# EAGLE board entireboard_v1 (EAGLE 8.6.0)
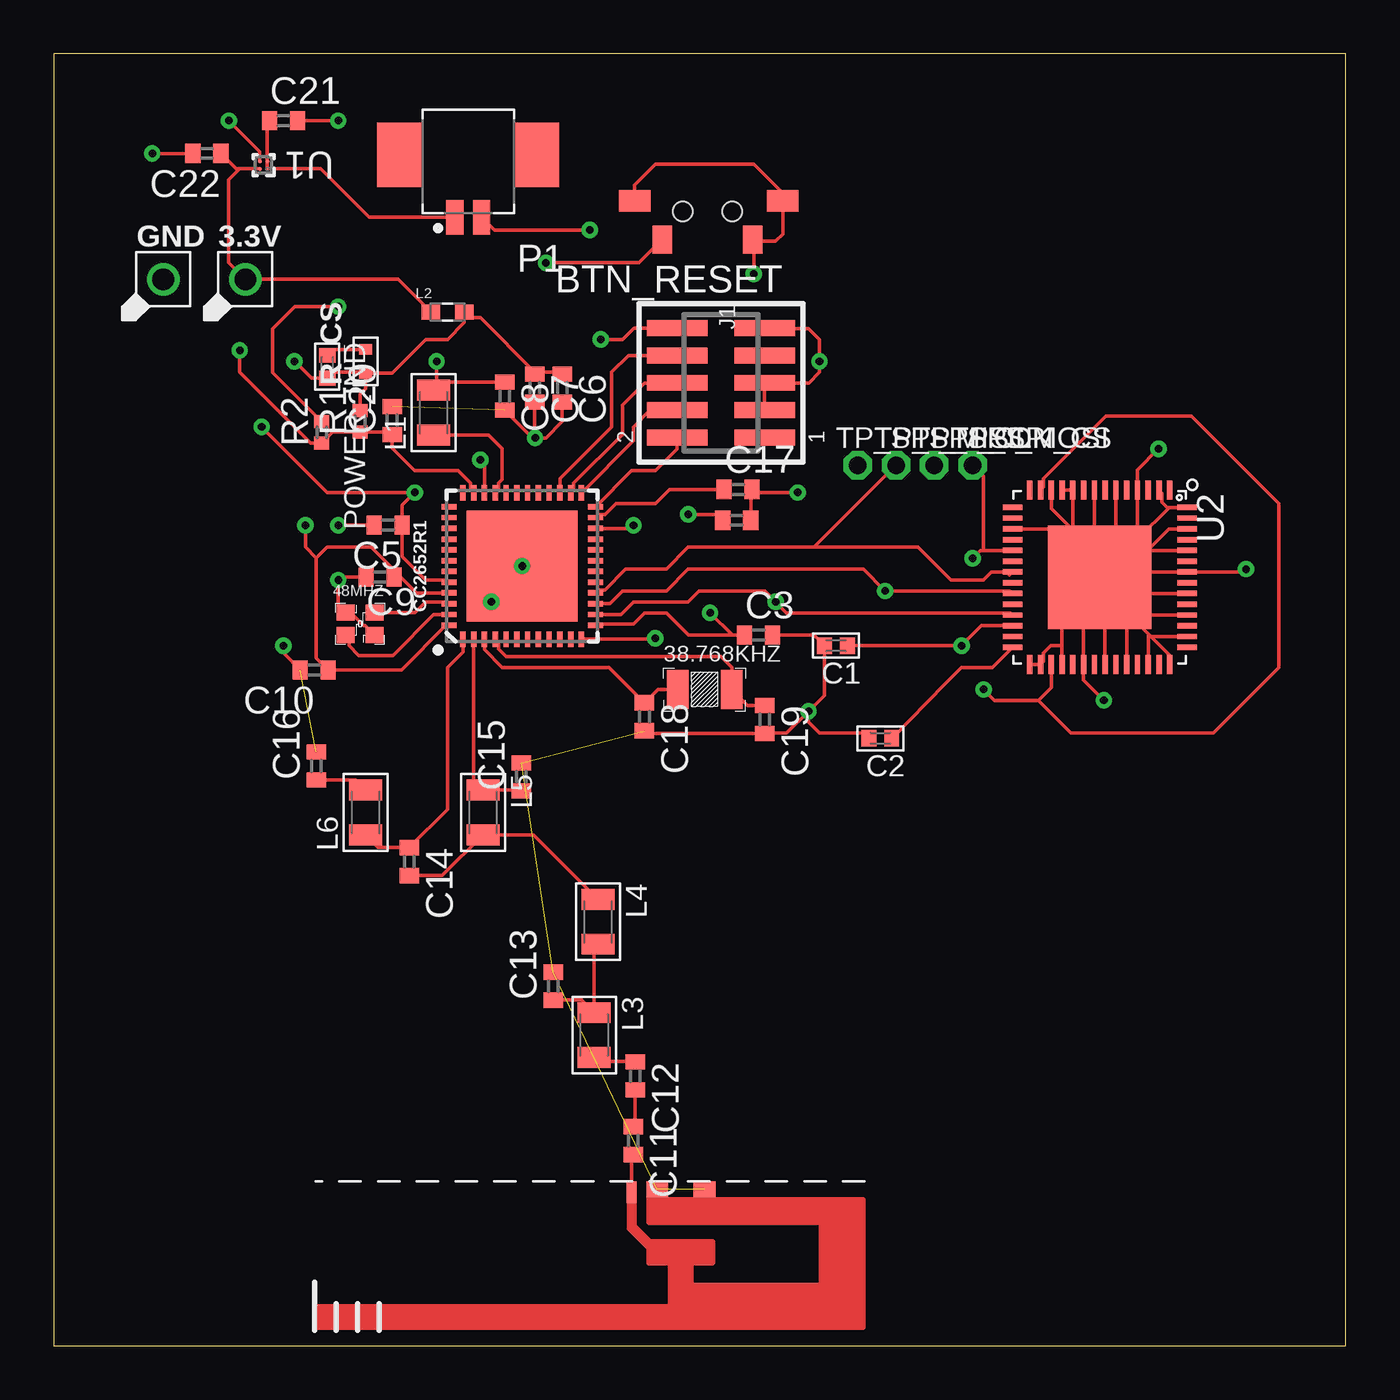
[diagram p0: board, top side]
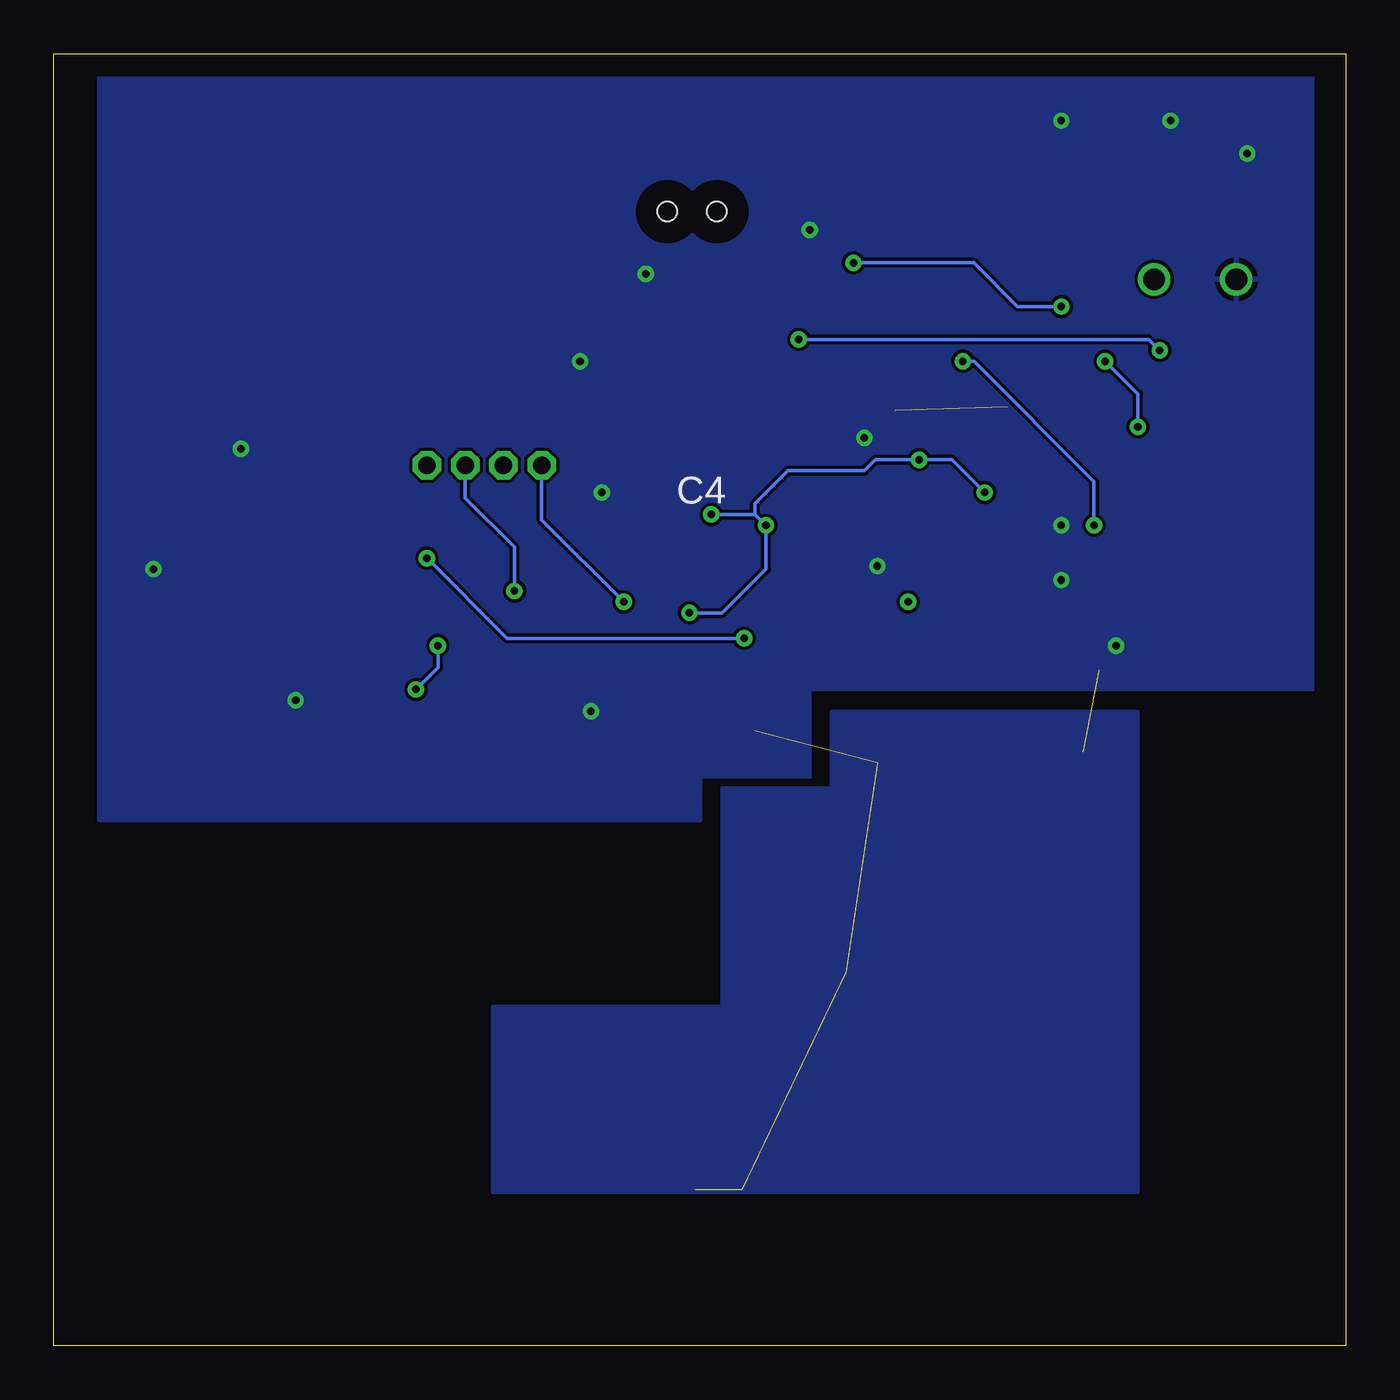
[diagram p1: board, bottom side, seen from below]

Size 60 x 60 mm. Coordinates in mm from the lower left corner, seen from the top.
Outline: 0,0 60,0 60,60 0,60 0,0
Copper layers (1*16): Top 0.035mm / dielectric 1.5mm / Bottom 0.035mm
Design rules "default": minimum track width 6mil, minimum drill 0.35mm, track to track 6mil, track to pad 6mil, pad to pad 6mil, via to via 6mil, smd to smd 6mil, copper to edge 40mil, drill to drill 6mil, minimum pad ring 10mil, minimum via ring 8mil, stop-mask expansion 4mil, vias tented up to drill 0mil, thermal gap 10mil
Net classes: 1 thick: width 1.016 mm; 2 power: width 0.61 mm

## Footprints (pad centres in the part's own frame; a part is rotated, then mirrored left to right if it is on the bottom)
PTH_2.54MM_01X01 = drill 1: P$1 0,0
2-SMD = smd 1 x 1.8: P$1 -1.25,0; P$2 1.25,0
4-SMD = smd 0.85 x 0.75: P$1 -0.675,-0.525; P$2 0.675,-0.525; P$3 0.675,0.525; P$4 -0.675,0.525
SW_1188E = smd 1.45 x 1: P$1 -3.5,-0.5; P$2 3.375,-0.5 | smd 0.9 x 1.3: P$3 -2.1,1.3; P$4 2.1,1.3 | hole 0.9: 1.15,0; -1.15,0
0402 = smd 0.686 x 0.762: 1 -0.533,0; 2 0.533,0
C0402 = smd 0.7 x 0.9: 1 -0.65,0; 2 0.65,0
CC2652R1_QFN-48 = smd 0.7 x 0.25: 1 -3.4,2.75; 2 -3.4,2.25; 3 -3.4,1.75; 4 -3.4,1.25; 5 -3.4,0.75; 6 -3.4,0.25; 7 -3.4,-0.25; 8 -3.4,-0.75; 9 -3.4,-1.25; 10 -3.4,-1.75; 11 -3.4,-2.25; 12 -3.4,-2.75; 25 3.4,-2.75; 26 3.4,-2.25; 27 3.4,-1.75; 28 3.4,-1.25; 29 3.4,-0.75; 30 3.4,-0.25; 31 3.4,0.25; 32 3.4,0.75; 33 3.4,1.25; 34 3.4,1.75; 35 3.4,2.25; 36 3.4,2.75 | smd 0.25 x 0.7: 13 -2.75,-3.4; 14 -2.25,-3.4; 15 -1.75,-3.4; 16 -1.25,-3.4; 17 -0.75,-3.4; 18 -0.25,-3.4; 19 0.25,-3.4; 20 0.75,-3.4; 21 1.25,-3.4; 22 1.75,-3.4; 23 2.25,-3.4; 24 2.75,-3.4; 37 2.75,3.4; 38 2.25,3.4; 39 1.75,3.4; 40 1.25,3.4; 41 0.75,3.4; 42 0.25,3.4; 43 -0.25,3.4; 44 -0.75,3.4; 45 -1.25,3.4; 46 -1.75,3.4; 47 -2.25,3.4; 48 -2.75,3.4 | smd 5.15 x 5.15: EGP 0,0
FTSH-105-01-XXX-DV-K = smd 0.737 x 2.794: 1 -2.54,-2.032; 2 -2.54,2.032; 3 -1.27,-2.032; 4 -1.27,2.032; 5 0,-2.032; 6 0,2.032; 7 1.27,-2.032; 8 1.27,2.032; 9 2.54,-2.032; 10 2.54,2.032
RHD2000_EVAL_BOARD_0805 = smd 0.965 x 1.524: 1 -1.041,0; 2 1.041,0
INDC1608X95 = smd 0.85 x 0.7: 1 -0.775,0; 2 0.775,0
MOLEX_0532610271 = smd 0.8 x 1.6: 1 0.625,0; 2 -0.625,0 | smd 2.1 x 3: 3 -3.175,-2.9; 4 3.175,-2.9
RHD2000_EVAL_BOARD_0402 = smd 0.686 x 0.762: 1 -0.533,0; 2 0.533,0
R0402 = smd 0.6 x 0.7: 1 -0.5,0; 2 0.5,0
R0402' = smd 0.5 x 0.6: P$1 -0.55,0; P$2 0.55,0
RHD2000_EVAL_BOARD_TESTPOINT_SMALL = drill 0.813 octagon: 1 0,0
YKA0004ACAC = smd 0.18 x 0.18: A1 -0.175,0.175; A2 0.175,0.175; B1 -0.175,-0.175; B2 0.175,-0.175
QFN56_8_X_8_LARGE = smd 0.9 x 0.25: 1 -4.05,3.25; 2 -4.05,2.75; 3 -4.05,2.25; 4 -4.05,1.75; 5 -4.05,1.25; 6 -4.05,0.75; 7 -4.05,0.25; 8 -4.05,-0.25; 9 -4.05,-0.75; 10 -4.05,-1.25; 11 -4.05,-1.75; 12 -4.05,-2.25; 13 -4.05,-2.75; 14 -4.05,-3.25; 29 4.05,-3.25; 30 4.05,-2.75; 31 4.05,-2.25; 32 4.05,-1.75; 33 4.05,-1.25; 34 4.05,-0.75; 35 4.05,-0.25; 36 4.05,0.25; 37 4.05,0.75; 38 4.05,1.25; 39 4.05,1.75; 40 4.05,2.25; 41 4.05,2.75; 42 4.05,3.25 | smd 0.25 x 0.9: 15 -3.25,-4.05; 16 -2.75,-4.05; 17 -2.25,-4.05; 18 -1.75,-4.05; 19 -1.25,-4.05; 20 -0.75,-4.05; 21 -0.25,-4.05; 22 0.25,-4.05; 23 0.75,-4.05; 24 1.25,-4.05; 25 1.75,-4.05; 26 2.25,-4.05; 27 2.75,-4.05; 28 3.25,-4.05; 43 3.25,4.05; 44 2.75,4.05; 45 2.25,4.05; 46 1.75,4.05; 47 1.25,4.05; 48 0.75,4.05; 49 0.25,4.05; 50 -0.25,4.05; 51 -0.75,4.05; 52 -1.25,4.05; 53 -1.75,4.05; 54 -2.25,4.05; 55 -2.75,4.05; 56 -3.25,4.05 | smd 4.8 x 4.8: CENTER 0,0
DN007+0 = smd 0.46 x 1: FEED 2.22,-2.8 | smd 1.01 x 0.74: GND -1.16,-2.93; GND@1 1.035,-2.93

## Placement (x,y rotation side)
3.3V  MF-CON-2.54mm-01x01  [PTH_2.54MM_01X01]  8.89,49.53 0 top
38.768KHZ  EPSON_32.768KHZ_CRYSTAL  [2-SMD]  30.23,30.48 0 top
48MHZ  NDK_48MHZ_CRYSTAL  [4-SMD]  14.22,33.53 0 top
BTN_RESET  SW_1188E  [SW_1188E]  30.36,52.67 180 top
C1  100n  [0402]  36.32,32.51 180 top
C2  10n  [0402]  38.39,28.21 180 top
C3  0.1uF  [C0402]  32.73,33.01 0 top
C4  0.1uF  [C0402]  31.72,38.34 0 top
C5  0.1uF  [C0402]  15.53,38.11 180 top
C6  22uF  [C0402]  23.61,44.48 270 top
C7  0.1uF  [C0402]  22.34,44.48 270 top
C8  22uF  [C0402]  20.94,44.1 270 top
C9  0.1uF  [C0402]  15.14,35.7 180 top
C10  0.1uF  [C0402]  12.1,31.38 180 top
C11  1.8pF  [C0402]  26.91,9.53 270 top
C12  12pF  [C0402]  27,12.53 270 top
C13  1pF  [C0402]  23.19,16.7 90 top
C14  1pF  [C0402]  16.51,22.48 270 top
C15  1pF  [C0402]  21.72,26.42 90 top
C16  12pF  [C0402]  12.19,26.92 90 top
C17  1uF  [C0402]  31.78,39.77 0 top
C18  12pF  [C0402]  27.43,29.21 270 top
C19  12pF  [C0402]  33.02,29.08 270 top
C20  0.1uF  [C0402]  15.71,42.97 90 top
C21  1uF  [C0402]  10.67,56.9 0 top
C22  1uF  [C0402]  7.11,55.37 180 top
CC2652R1  CC2652R1  [CC2652R1_QFN-48]  21.75,36.21 90 top
GND  MF-CON-2.54mm-01x01  [PTH_2.54MM_01X01]  5.08,49.53 0 top
J1  FTSH-105-01-XXX-DV-K  [FTSH-105-01-XXX-DV-K]  30.98,44.72 90 top
L1  6.8uH  [RHD2000_EVAL_BOARD_0805]  17.64,43.34 90 top
L2  BLM18HE152SN1D  [INDC1608X95]  18.29,48.01 0 top
L3  2nH  [RHD2000_EVAL_BOARD_0805]  25.1,14.43 270 top
L4  2nH  [RHD2000_EVAL_BOARD_0805]  25.27,19.68 270 top
L5  2.4nH  [RHD2000_EVAL_BOARD_0805]  19.94,24.77 270 top
L6  2.4nH  [RHD2000_EVAL_BOARD_0805]  14.48,24.77 90 top
P1  0532610271  [MOLEX_0532610271]  19.25,52.4 180 top
POWER_IND  LED-SMD  [RHD2000_EVAL_BOARD_0402]  12.7,45.47 270 top
R1  100k  [R0402]  14.22,42.93 90 top
R2  [R0402]  12.45,42.42 90 top
R_CS  0.01ohm  [R0402']  14.48,45.72 90 top
TP_SPI_CLK  RHD2000_EVAL_BOARD_TESTPOINT_SMALL  [RHD2000_EVAL_BOARD_TESTPOINT_SMALL]  39.12,40.89 0 top
TP_SPI_CS  RHD2000_EVAL_BOARD_TESTPOINT_SMALL  [RHD2000_EVAL_BOARD_TESTPOINT_SMALL]  42.67,40.89 0 top
TP_SPI_MISO  RHD2000_EVAL_BOARD_TESTPOINT_SMALL  [RHD2000_EVAL_BOARD_TESTPOINT_SMALL]  37.34,40.89 0 top
TP_SPI_MOSI  RHD2000_EVAL_BOARD_TESTPOINT_SMALL  [RHD2000_EVAL_BOARD_TESTPOINT_SMALL]  40.89,40.89 0 top
U1  YKA  [YKA0004ACAC]  9.74,54.83 180 top
U2  RHD2216_QFN  [QFN56_8_X_8_LARGE]  48.58,35.69 270 top
U$2  INVERTED_F_ANTENNA+0  [DN007+0]  29.06,4.33 180 top

## Library data of the parts
3.3V GND = AxonMobile; HOUSEPART: YES; MPN: MF-CON-2.54mm-01x01; POPULATE: 1; URL: https://factory.macrofab.com/part/MF-CON-2.54mm-01x01
38.768KHZ 48MHZ BTN_RESET CC2652R1 J1 L1 L3-L6 POWER_IND TP_SPI_CLK TP_SPI_CS TP_SPI_MISO TP_SPI_MOSI = AxonMobile
C1 C2 = RHD2000_eval_board
C3-C22 = adafruit
L2 = BLM18HE152SN1D; DIGI-KEY_PART_NUMBER: 490-5216-1-ND; DIGI-KEY_PURCHASE_URL: https://www.digikey.com/product-detail/en/murata-electronics-north-america/BLM18HE152SN1D/490-5216-1-ND/1948392?utm_source=snapeda&utm_medium=aggregator&utm_campaign=symbol; MF: Murata Electronics; MP: BLM18HE152SN1D; PACKAGE: 0603 Samtec
P1 = 0532610271; DESCRIPTION: 1.25mm _.049_ Pitch PicoBlade Header, Surface Mount, Right Angle, Lead-free, 2 Circuits; DIGI-KEY_PART_NUMBER: WM7620CT-ND; DIGI-KEY_PURCHASE_URL: https://www.digikey.com/product-detail/en/molex-llc/0532610271/WM7620CT-ND/699107?utm_source=snapeda&utm_medium=aggregator&utm_campaign=symbol; MF: Molex, LLC; MP: 0532610271; PACKAGE: None
R1 R2 = AxonMobile; SPICEPREFIX: R
R_CS = MF_Passives; POPULATE: 1
U1 = yka0004
U2 = RHD2000
U$2 = antenna

## Nets
DCDC_SW: CC2652R1.33 L1.1
GND: 48MHZ.P$2 48MHZ.P$4 BTN_RESET.P$1 BTN_RESET.P$2 BTN_RESET.P$3 C1.2 C2.2 C3.2 C4.2 C5.2 C6.2 C7.2 C8.2 C9.2 C10.2 C13.2 C15.2 C16.2 C17.2 C18.2 C19.2 C20.2 C21.2 C22.2 CC2652R1.EGP GND.P$1 J1.3 J1.5 J1.9 P1.2 U1.B2 U2.2 U2.4 U2.6 U2.8 U2.10 U2.11 U2.12 U2.17 U2.29 U2.30 U2.32 U2.34 U2.36 U2.38 U2.40 U2.42 U2.44 U2.46 U2.48 U2.50 U2.52 U2.54 U2.56 U2.CENTER U$2.GND U$2.GND@1
JTAG_TCK: CC2652R1.25 J1.4
JTAG_TDI: CC2652R1.27 J1.8
JTAG_TDO: CC2652R1.26 J1.6
JTAG_TMS: CC2652R1.24 J1.2
N$1: C17.1 CC2652R1.23
N$3: 48MHZ.P$1 CC2652R1.47
N$4: 48MHZ.P$3 CC2652R1.46
N$5: 38.768KHZ.P$1 C18.1 CC2652R1.3
N$6: C11.1 C12.2
N$7: C12.1 L3.2
N$8: C13.1 L3.1 L4.2
N$9: C14.2 L4.1 L5.2
N$10: 38.768KHZ.P$2 C19.1 CC2652R1.4
N$11: C11.2 U$2.FEED
N$12: C16.1 L6.2
N$13: POWER_IND.1 R_CS.P$2
N$14: C21.1 P1.1 U1.A1 U1.B1
N$16: BTN_RESET.P$4 R2.2
N$42: C2.1 U2.28
RF_N: C15.1 CC2652R1.2 L5.1
RF_P: C14.1 CC2652R1.1 L6.1
SPI_CLK: CC2652R1.16 TP_SPI_CLK.1 U2.21
SPI_CS_TP: CC2652R1.12 TP_SPI_CS.1 U2.19
SPI_MISO: CC2652R1.14 TP_SPI_MISO.1 U2.25
SPI_MOSI: CC2652R1.15 TP_SPI_MOSI.1 U2.23
VCC: C1.1 U2.13 U2.26 U2.31
VDDR: C8.1 C9.1 C10.1 CC2652R1.45 CC2652R1.48 L1.2
VDDS: C3.1 C4.1 C5.1 C6.1 C7.1 CC2652R1.13 CC2652R1.22 CC2652R1.34 CC2652R1.44 L2.2 POWER_IND.2 R1.2 R_CS.P$1
WMCU_RESET: C20.1 CC2652R1.35 J1.10 R1.1 R2.1
WMCU_VDD: 3.3V.P$1 C22.1 L2.1 U1.A2

## Tracks (layer width: path | path; a pad name or v marks a point on that pad's centre or on a via)
DCDC_SW
  Top 0.152: L1.1 20.19,42.3 20.83,41.66 20.83,40.23 20.65,40.05 20.65,39.76 CC2652R1.33
GND  (via drill 0.35)  (6 unrouted)
  Top 0.152: U2.29 U2.30 45.97,31.78 45.97,32.18 46.3,32.51 46.83,32.51 | U2.32 46.83,32.51 | 46.83,32.51 46.83,33.94 47.83,34.94 | 47.83,34.94 U2.34 47.83,30.91 v48.77,29.97 | 47.83,34.94 U2.CENTER | U2.36 48.83,35.05 | 48.83,35.05 48.83,35.44 U2.CENTER | U2.38 49.83,34.05 | 49.83,34.05 48.94,34.94 | U2.40 50.83,33.05 | 50.83,33.05 49.94,33.94 | U2.42 51.83,32.05 50.94,32.94 | U2.44 50.94,32.94 | 50.94,32.94 50.83,33.05 | U2.46 49.94,33.94 | 49.94,33.94 49.83,34.05 | U2.48 48.94,34.94 | 48.94,34.94 48.83,35.05 | v55.37,36.07 55.24,35.94 U2.50 49.78,35.94 | 49.78,35.94 49.28,35.94 | 49.28,35.94 48.83,35.94 U2.CENTER | U2.52 50.78,36.94 | 50.78,36.94 50.36,36.51 | 50.36,36.51 49.78,35.94 | U2.54 51.78,37.94 50.78,36.94 | U2.2 51.47,39.59 51.47,39.19 51.73,38.94 51.82,38.94 | U2.56 51.82,38.94 | 51.82,38.94 50.36,37.48 | 50.36,37.48 50.36,36.51 | 50.36,37.48 50.33,37.51 U2.4 50.33,40.67 v51.31,41.66 | U2.6 49.33,35.99 49.28,35.94 | U2.8 48.33,36.89 | 48.33,36.89 49.28,35.94 | 47.33,37.89 U2.10 U2.11 | 47.33,37.89 48.33,36.89 | U2.12 46.33,38.89 47.28,37.94 | U2.17 47.28,37.94 | 47.28,37.94 47.33,37.89 | C18.2 27.56,28.43 C19.2 33.03,28.45 34.04,28.45 v35.05,29.46 | C2.2 37.61,28.45 35.56,28.45 35.05,28.96 v35.05,29.46 | v35.05,29.46 35.79,30.2 C1.2 35.3,33.01 C3.2 | J1.3 J1.5 35.06,44.72 35.56,45.21 v35.56,45.72 35.56,46.74 35.05,47.24 33.03,47.24 J1.9 | 48MHZ.P$2 14.45,33.45 14.38,33.45 13.78,34.05 48MHZ.P$4 13.21,34.39 v13.21,35.56 13.35,35.7 C9.2 | C10.2 10.67,32.16 v10.67,32.51 | C5.2 13.22,38.11 v13.21,38.1 | C8.2 22.23,42.16 v22.35,42.16 | C7.2 22.34,42.18 v22.35,42.16 | C6.2 23.61,42.91 22.86,42.16 v22.35,42.16 | C17.2 32.54,39.65
  Top 0.152: 32.54,39.65 32.57,39.62 v34.54,39.62 | C4.2 32.37,39.48 32.54,39.65 | BTN_RESET.P$2 26.98,53.9 27.94,54.86 32.51,54.86 33.85,53.52 BTN_RESET.P$1 33.85,51.63 33.53,51.31 32.52,51.31 BTN_RESET.P$3 32.51,51.32 v32.51,49.78 | C21.2 v13.21,56.9 | C22.2 v4.57,55.37 | U1.B2 9.56,55.46 v8.13,56.9 | P1.2 20.46,51.82 v24.89,51.82
  other vias: 21.75,36.21
  pour Bottom: 39.62,7.11 19.81,7.11 9.65,7.11 9.65,29.46 20.83,29.46 23.88,29.46 23.88,25.91 28.96,25.91 28.96,15.75 38.1,15.75 39.62,15.75
  pour Bottom: 9.65,30.48 1.52,30.48 1.52,58.93 57.91,58.93 57.91,36.58 57.91,24.38 31.5,24.38 29.97,24.38 29.97,26.42 24.89,26.42 24.89,30.48 23.88,30.48
JTAG_TCK
  Top 0.152: CC2652R1.25 26.92,42.03 26.92,42.67 27.7,43.45 J1.4
JTAG_TDI
  Top 0.152: CC2652R1.27 23.5,40.27 25.91,42.67 25.91,45.21 26.68,45.99 J1.8
JTAG_TDO
  Top 0.152: CC2652R1.26 24.15,39.76 24.15,40.05 26.42,42.32 26.42,43.69 27.44,44.72 J1.6
JTAG_TMS
  Top 0.152: CC2652R1.24 26.83,40.64 27.94,40.64 28.95,41.65 J1.2
N$1
  Top 0.152: CC2652R1.23 25.3,38.6 25.6,38.6 26.11,39.12 27.94,39.12 28.59,39.77 C17.1
N$2  (via drill 0.35)
  other vias: 20.32,34.54
N$3
  Top 0.152: 48MHZ.P$1 13.72,32.84 13.72,32.51 14.17,32.06 15.75,32.06 17.64,33.96 CC2652R1.47
N$4
  Top 0.152: 48MHZ.P$3 16.78,34.05 17.27,34.54 18.27,34.54 CC2652R1.46
N$5
  Top 0.152: 38.768KHZ.P$1 28.05,30.48 C18.1 25.8,31.5 20.83,31.5 20,32.32 CC2652R1.3
N$6
  Top 0.152: C11.1 27,10.27 C12.2
N$7
  Top 0.152: C12.1 26.97,13.21 24.92,13.21 | 24.38,13.21 24.92,13.21 | 24.92,13.21 L3.2
N$8
  Top 0.152: C13.1 24.52,16.05 L3.1 25.1,18.47 L4.2
N$9
  Top 0.152: L4.1 22.28,23.72 L5.2 18.04,21.83 C14.2
N$10
  Top 0.152: 38.768KHZ.P$2 | 38.768KHZ.P$2 32.22,29.73 C19.1 | CC2652R1.4 20.65,32.66 20.65,32.36 21.01,32 30.99,32 31.49,31.51 38.768KHZ.P$2
N$11
  Top 0.152: U$2.FEED 26.84,8.8 C11.2
N$12
  Top 0.152: L6.2 14.01,26.27 C16.1
N$13
  Top 0.152: R_CS.P$2 12.97,46.27 POWER_IND.1
N$14
  Top 0.152: C21.1 9.91,56.79 U1.B1 U1.A1 12.4,54.66 14.65,52.4 P1.1 18.54,52.83
N$16  (via drill 0.35)
  Top 0.152: R2.2 10.16,45.2 10.16,47.24 11.18,48.26 v13.21,48.26 | BTN_RESET.P$4 27.3,50.42 27.17,50.29 v22.86,50.29
  Bottom 0.152: v13.21,48.26 15.24,48.26 17.27,50.29 v22.86,50.29
N$42
  Top 0.152: C2.1 41.42,30.75 42.16,31.5 43.58,31.5 U2.28
RF_N
  Top 0.152: C15.1 21.68,25.81 L5.1 19.5,26.24 CC2652R1.2
RF_P
  Top 0.152: L6.1 15.07,23.13 C14.1 18.29,24.91 18.29,31.5 19,32.21 CC2652R1.1
SPI_CLK
  Top 0.152: CC2652R1.16 25.3,35.1 25.6,35.1 26.56,36.07 28.45,36.07 29.46,37.08 35.05,37.08 35.31,37.08 | 44.38,35.79 U2.21 43.56,35.94 43.18,35.56 41.66,35.56 40.13,37.08 35.31,37.08 | 35.31,37.08 TP_SPI_CLK.1
SPI_CS_TP  (via drill 0.35)
  Top 0.152: CC2652R1.12 27.9,32.81 v27.94,32.85 | v42.67,36.58 43.03,36.94 43.18,36.94 | U2.19 43.18,36.94 | 43.18,36.94 43.18,40.39 TP_SPI_CS.1
  Bottom 0.152: v27.94,32.85 38.95,32.85 v42.67,36.58
SPI_MISO  (via drill 0.35)
  Top 0.152: CC2652R1.14 26.34,33.96 26.92,34.54 29.46,34.54 29.97,35.05 33.02,35.05 v33.53,34.54 34.04,34.04 44.43,34.04 U2.25
  Bottom 0.152: TP_SPI_MISO.1 37.34,38.35 v33.53,34.54
SPI_MOSI  (via drill 0.35)
  Top 0.152: CC2652R1.15 25.82,34.46 26.42,35.05 28.45,35.05 29.46,36.07 37.59,36.07 v38.61,35.05 44.41,35.05 U2.23
  Bottom 0.152: v38.61,35.05 38.61,37.08 40.89,39.37 TP_SPI_MOSI.1
VCC  (via drill 0.35)
  Top 0.152: U2.31 46.33,30.58 45.72,29.97 | v43.18,30.48 43.69,29.97 45.72,29.97 | U2.26 43.09,33.44 v42.16,32.51 C1.1 | U2.13 45.97,39.88 45.97,40.28 48.87,43.18 52.83,43.18 56.9,39.12 56.9,31.5 53.85,28.45 47.24,28.45 45.72,29.97
  Bottom 0.152: v43.18,30.48 42.16,31.5 v42.16,32.51
VDDR  (via drill 0.35)
  Top 0.152: CC2652R1.45 16.86,34.96 16.11,35.7 C9.1 15.79,36.02 14.73,37.08 12.7,37.08 12.19,36.58 | CC2652R1.48 18.22,33.46 16.14,31.38 C10.1 12.19,31.94 12.19,36.58 | C8.1 18.01,44.75 L1.2 17.78,44.52 v17.78,45.72 | v11.68,38.1 11.68,37.08 12.19,36.58
  Bottom 0.152: v17.78,45.72 17.27,45.72 11.68,40.13 v11.68,38.1
VDDS  (via drill 0.35)
  Top 0.152: CC2652R1.44 18.25,35.56 17.27,35.56 16.18,36.66 C5.1 16.18,39.04 v16.76,39.62 12.7,39.62 v9.65,42.67 | CC2652R1.34 20,40.96 v19.81,41.15 | R1.2 14.22,44.2 14.48,44.45 R_CS.P$1 | R_CS.P$1 14.44,45.21 12.98,45.21 POWER_IND.2 11.96,44.93 v11.18,45.72 | R_CS.P$1 15.71,45.17 17.27,46.74 18.29,46.74 19.06,47.51 L2.2 19.32,47.75 19.81,47.75 22.34,45.23 22.34,45.21 | 22.34,45.21 C7.1 | C6.1 23.53,45.21 22.34,45.21 | CC2652R1.13 25.22,33.53 26.92,33.53 27.43,34.04 28.45,34.04 29.48,33.01 C3.1 31.51,33.01 v30.48,34.04 | CC2652R1.22 26.78,37.96 v26.92,38.1 | C4.1 30.8,38.61 v29.46,38.61
  Bottom 0.152: v16.76,39.62 18.29,41.15 v19.81,41.15 21.84,41.15 22.35,40.64 25.91,40.64 27.43,39.12 27.43,38.61 | v9.65,42.67 9.65,44.2 v11.18,45.72 | 27.43,38.61 v26.92,38.1 26.92,36.07 28.96,34.04 v30.48,34.04 | v29.46,38.61 27.43,38.61
WMCU_RESET  (via drill 0.35)
  Top 0.152: CC2652R1.35 19.36,39.76 19.36,40.05 18.77,40.64 16.76,40.64 15.71,41.69 C20.1 15.61,42.43 R1.1 12.95,42.43 R2.1 11.93,41.92 9.14,44.7 8.64,45.21 v8.64,46.23 | v25.4,46.74 26.42,46.74 26.94,47.26 J1.10
  Bottom 0.152: v8.64,46.23 9.14,46.74 v25.4,46.74
WMCU_VDD
  Top 0.152: L2.1 15.99,49.53 3.3V.P$1 8.13,50.29 8.13,54.15 8.64,54.66 | C22.1 8.48,54.66 8.64,54.66 | 8.64,54.66 U1.A2